# Altium PCB A_PCB.PcbDoc
Units mm, origin at the board's own origin, x right, y up, seen from the top; angles counter-clockwise.
Board outline 76.2 x 64.64 mm, 2 copper layers (Top Layer, Bottom Layer); 24 components, 14 nets, 58 pads, 0 vias.
Unrouted connection lines stored in the file: 3.
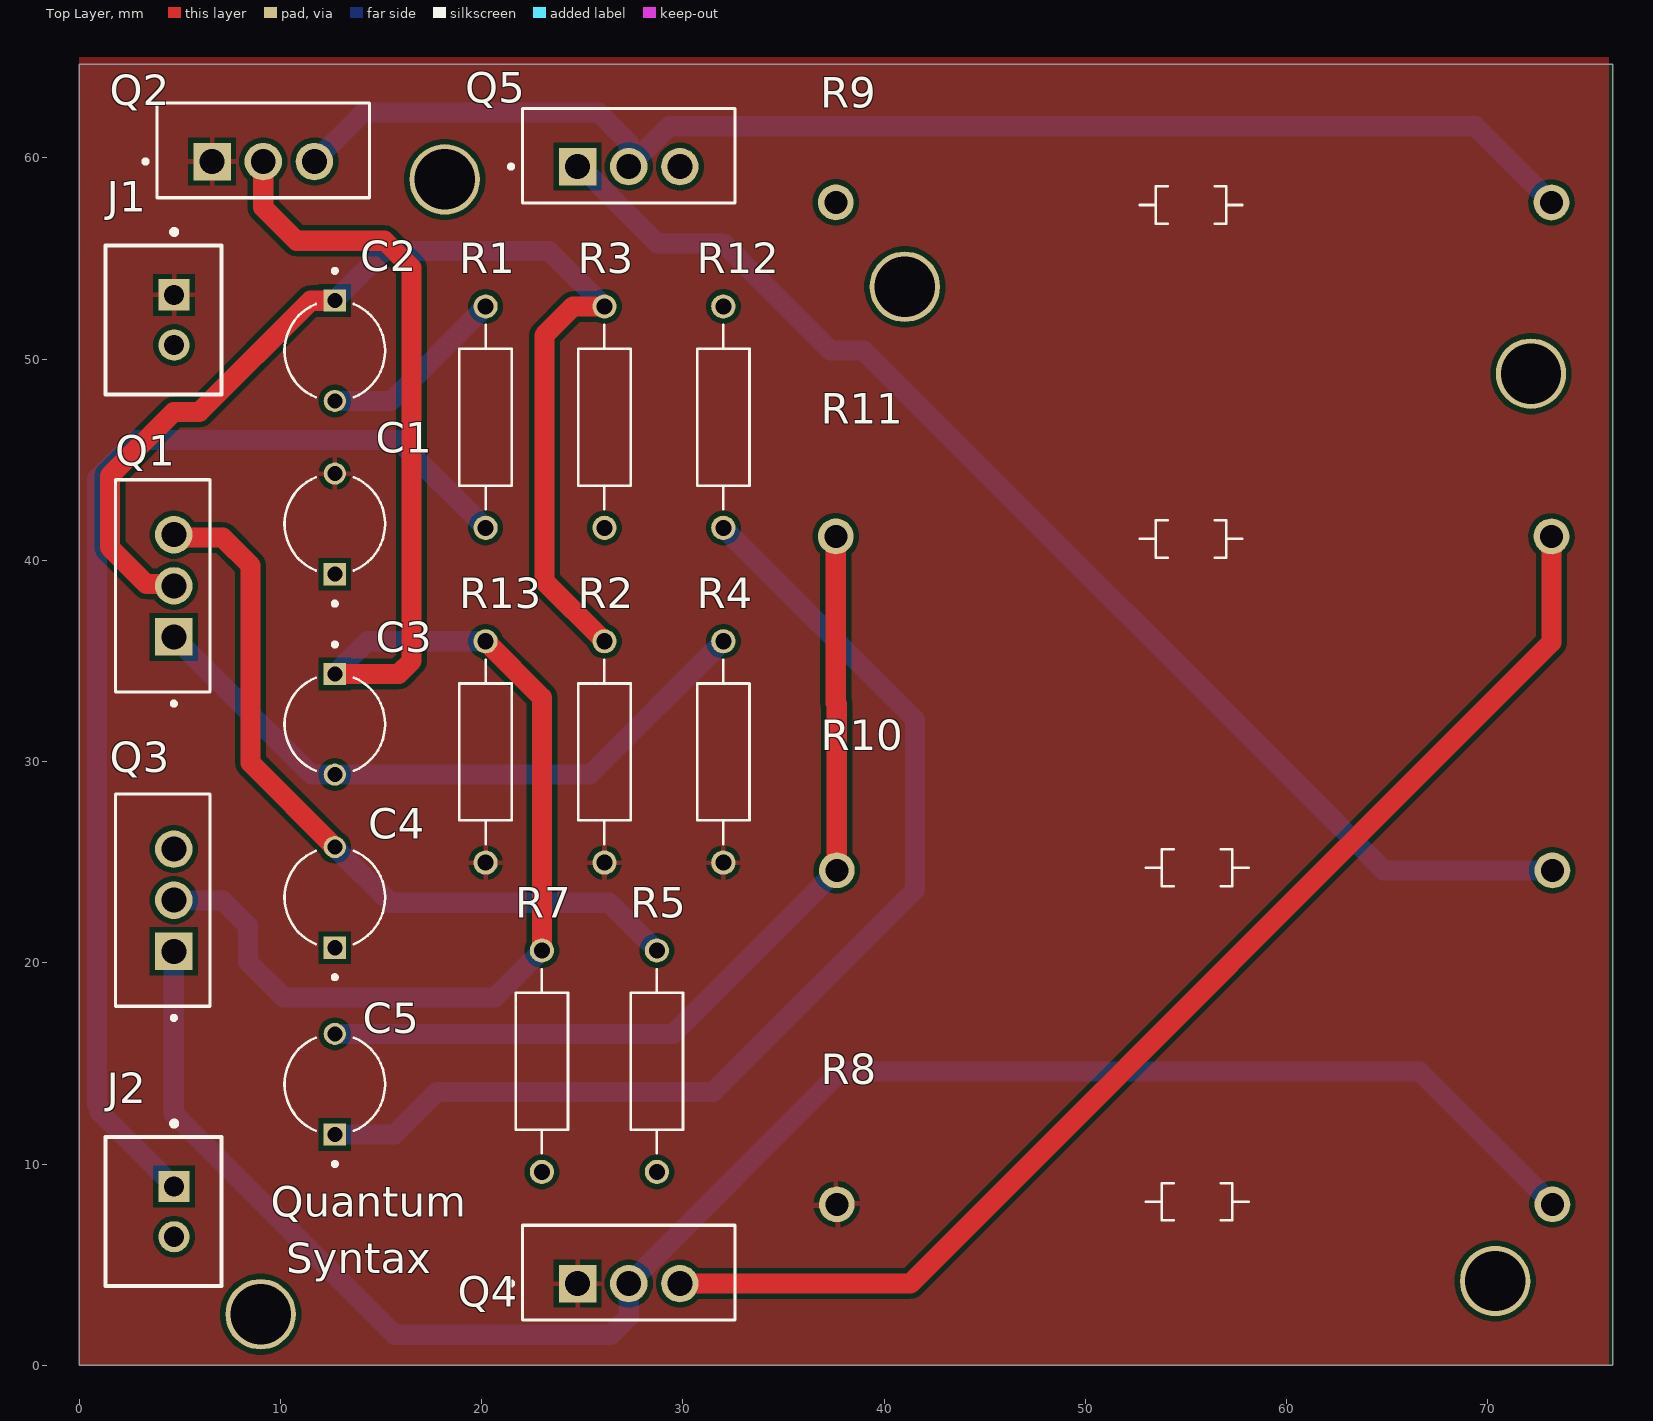
[diagram p0: Top Layer view]
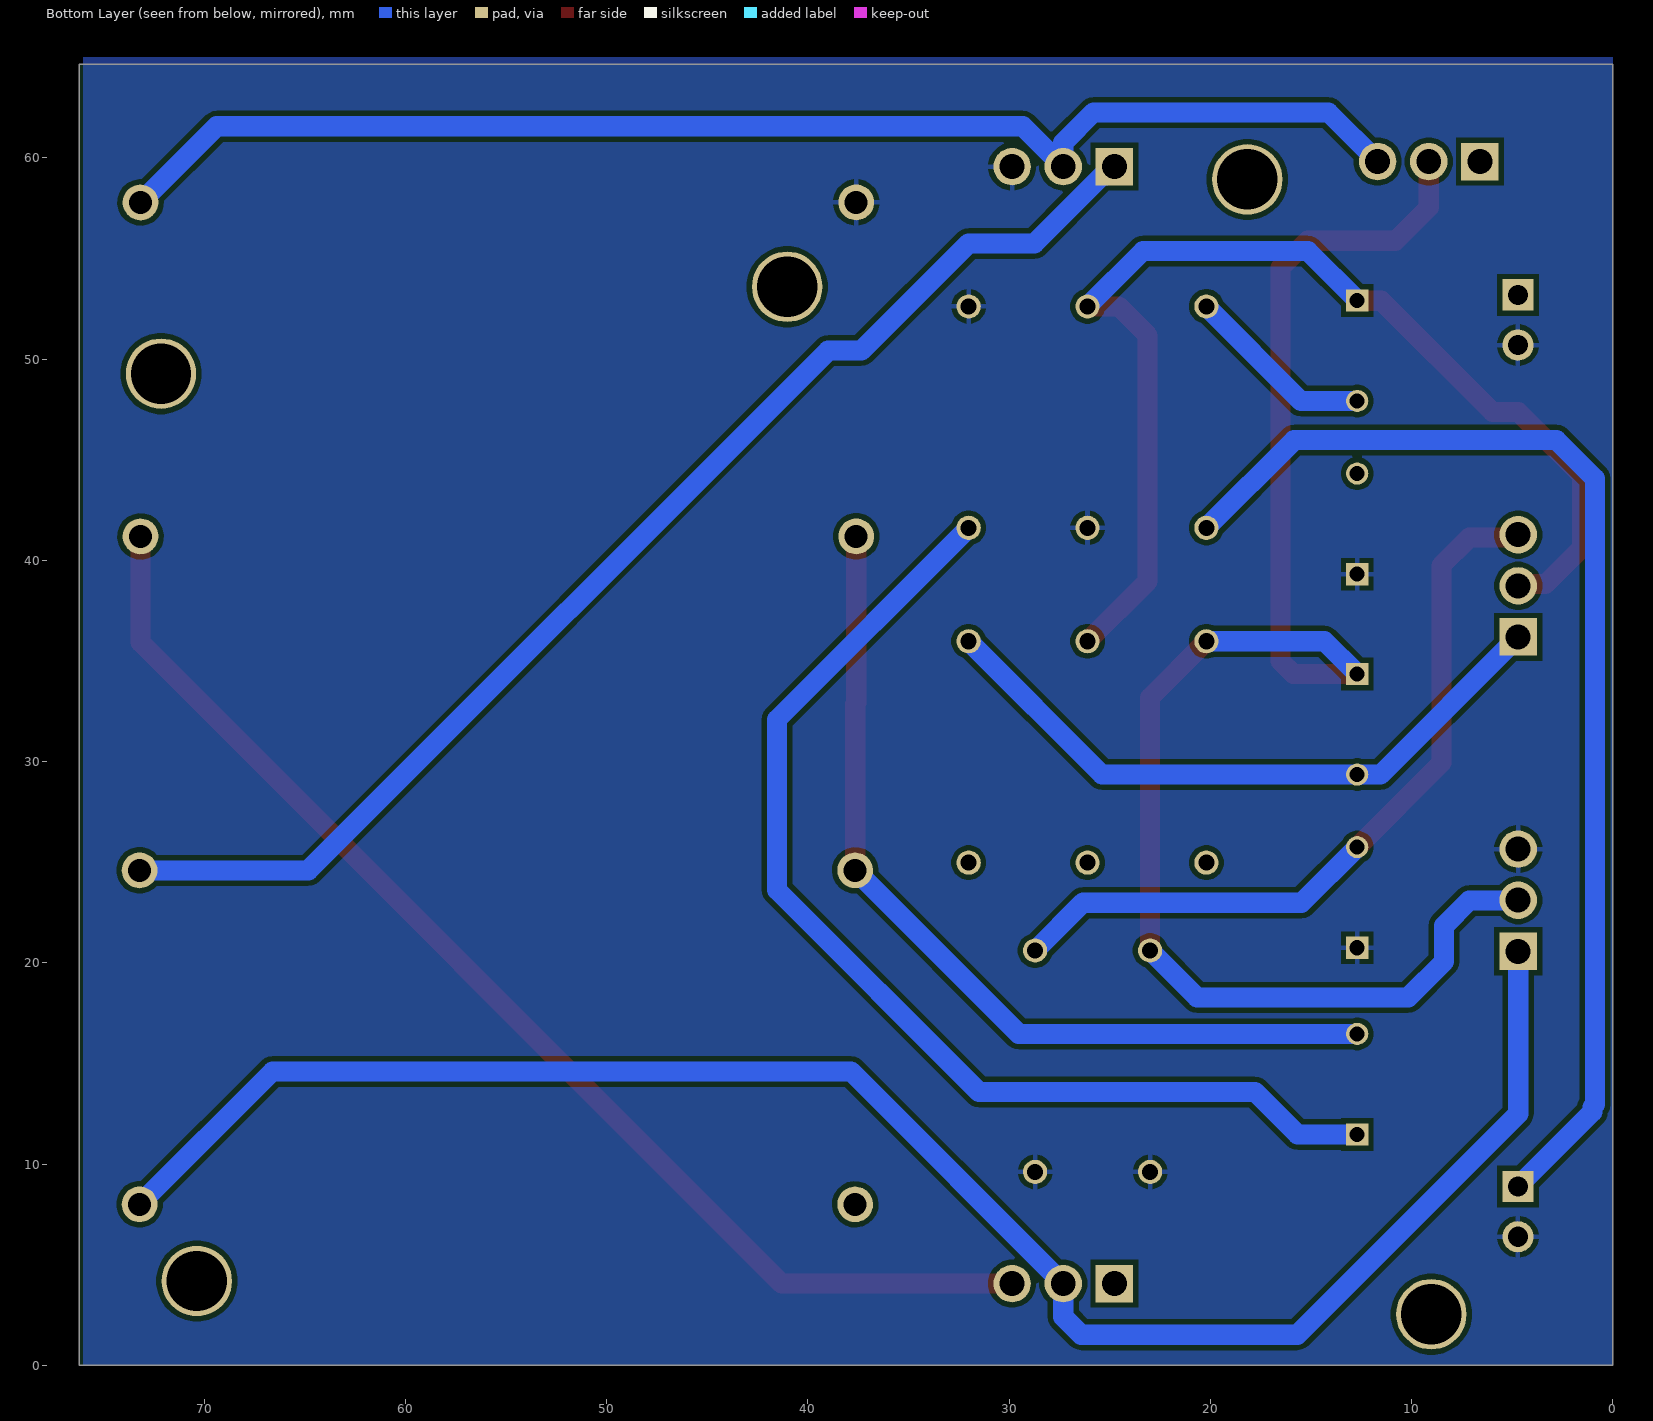
[diagram p1: Bottom Layer view, seen from below]
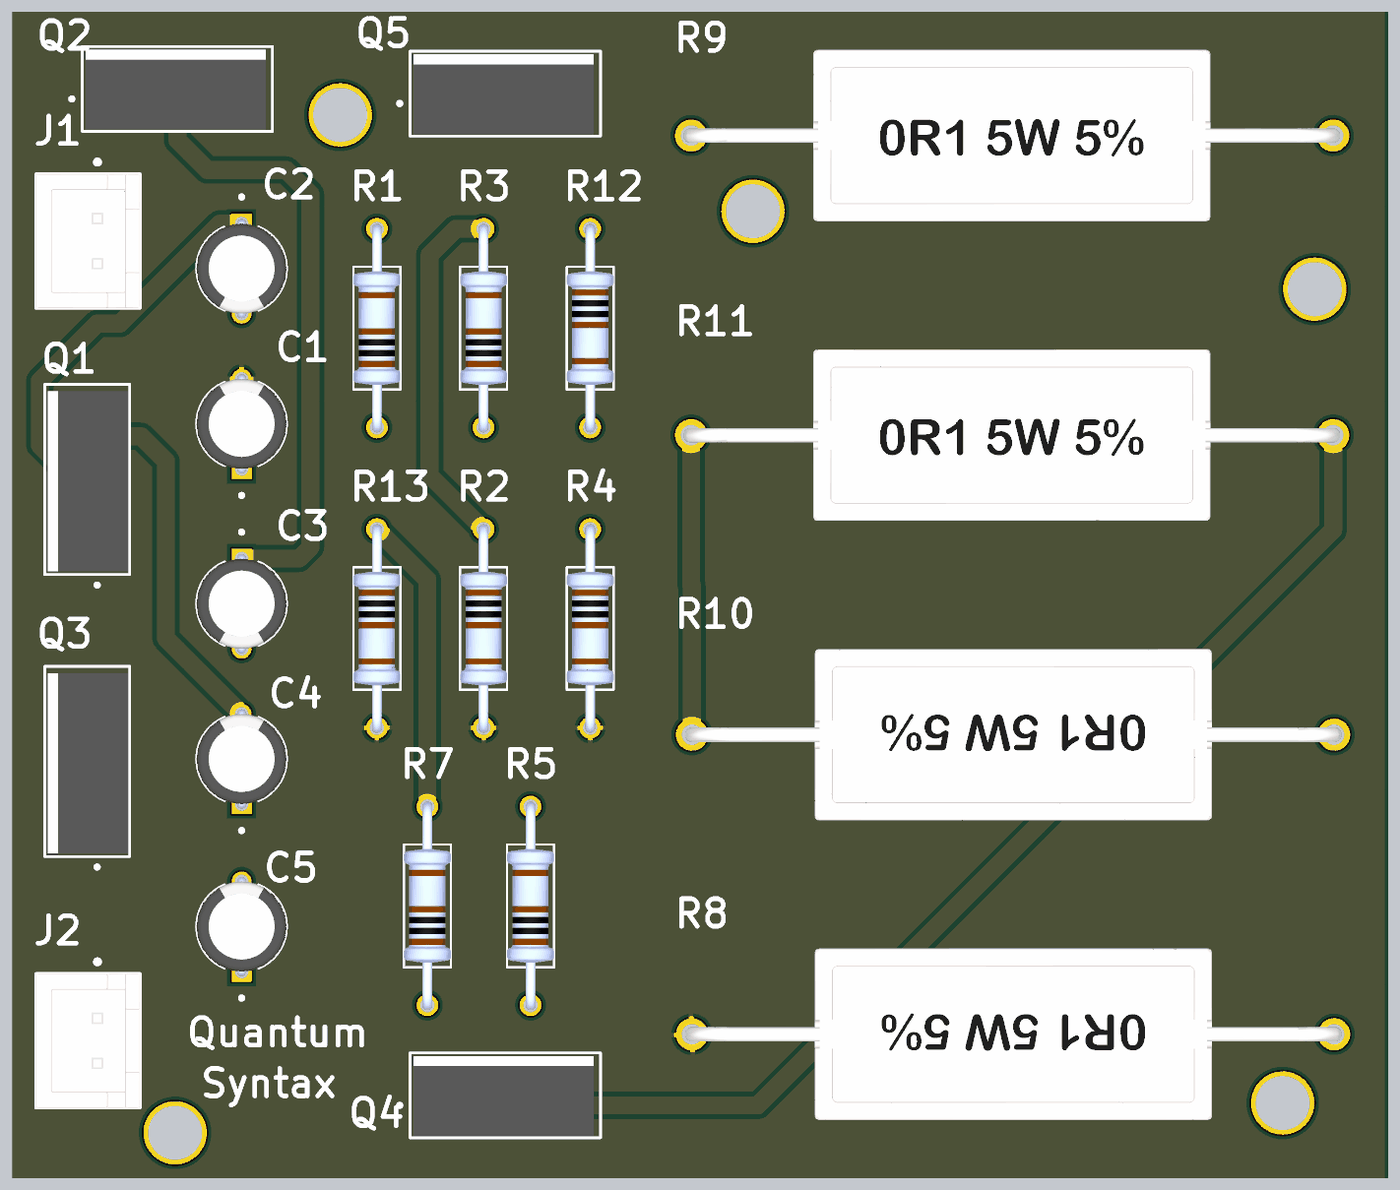
[diagram p2: 3D render of the assembled board from above, using the file's embedded part models]

## Layer stack, top to bottom
Top Solder: solder mask 0.0102, Solder Resist, Dk 3.5
Top Layer: signal copper 0.0356
Dielectric 1: dielectric 0.32, FR-4, Dk 4.8
Bottom Layer: signal copper 0.0356
Bottom Solder: solder mask 0.0102, Solder Resist, Dk 3.5

## Board outline
76.2,0 76.2,64.643 0,64.643 0,0

## Design rules (kind name [scope] priority, off if disabled: settings)
Clearance [All] p1: gap=0.254 ignorepadtopadclearanceinfootprint=FALSE except(0: Arc-Hole Track-Hole SMDPad-Hole THPad-Hole Via-Hole Fill-Hole Poly-Hole Region-Hole Text-Hole)
PolygonConnect [All] p1: connectstyle=Relief reliefconductorwidth=0.254 reliefentries=4 polygonreliefangle="90 Angle" airgapwidth=0.254
RoutingVias [All] p1: holewidth=0.711 width=1.27 viastyle="Through Hole" minholewidth=0.711 minwidth=1.27 maxholewidth=0.711 maxwidth=1.27
SolderMaskExpansion [All] p1: expansion=0.102 istentingtop=FALSE
Width [All] p1: maxlimit=1 minlimit=1 preferedwidth=1 minimp=50.000000 maximp=50.000000 favimp=50.000000
30 further rules are at their usual default settings.

## Classes and differential pairs
component class PCB_Schematic: C1 C2 C4 C5 J1 J2 Q1 Q2 Q3 Q5 R1 R2 R3 R4 R5 R7 R8 R9 R10 R11 R12 R13

## Components (designator, comment, footprint, x,y, rotation, side; value= is the part's Value field where it differs from the comment)
C1 "ECA1HM220E" CAPPRD500W50D500H1100 12.7,41.813 r90 top
C2 "ECA1HM220E" CAPPRD500W50D500H1100 12.7,50.419 r270 top
C3 "ECA1HM220E" CAPPRD500W50D500H1100 12.7,31.857 r270 top
C4 "ECA1HM220E" CAPPRD500W50D500H1100 12.7,23.251 r90 top
C5 "ECA1HM220E" CAPPRD500W50D500H1100 12.7,13.97 r90 top
J1 "B2B-XH-A(LF)(SN)" FP-B2B-XH-A_LF_SN-MFG 4.191,51.943 r270 top
J2 "B2B-XH-A(LF)(SN)" FP-B2B-XH-A_LF_SN-MFG 4.191,7.64 r270 top
Q1 "LM7805CT/NOPB" TO254P1054X470X2600-3 4.699,36.195 r90 top
Q2 "LM7805CT/NOPB" TO254P1054X470X2600-3 6.604,59.817 r0 top
Q3 "LM7805CT/NOPB" TO254P1054X470X2600-3 4.699,20.574 r90 top
Q4 "LM7805CT/NOPB" TO254P1054X470X2600-3 24.765,4.064 r0 top
Q5 "LM7805CT/NOPB" TO254P1054X470X2600-3 24.765,59.563 r0 top
R1 "MFR-25FBF52-1K" RESAD1100W55L680D260 20.193,47.117 r90 top
R2 "MFR-25FBF52-1K" RESAD1100W55L680D260 26.098,30.48 r270 top
R3 "MFR-25FBF52-1K" RESAD1100W55L680D260 26.098,47.117 r90 top
R4 "MFR-25FBF52-1K" RESAD1100W55L680D260 32.004,30.48 r270 top
R5 "MFR-25FBF52-1K" RESAD1100W55L680D260 28.702,15.113 r90 top
R7 "MFR-25FBF52-1K" RESAD1100W55L680D260 22.987,15.113 r90 top
R8 "1623928-4" RESAD700W45L350D185 55.549,8.128 r180 top
R9 "1623928-4" RESAD700W45L350D185 55.245,57.658 r0 top
R10 "1623928-4" RESAD700W45L350D185 55.549,24.723 r180 top
R11 "1623928-4" RESAD700W45L350D185 55.245,41.063 r0 top
R12 "MFR-25FBF52-1K" RESAD1100W55L680D260 32.004,47.117 r270 top
R13 "MFR-25FBF52-1K" RESAD1100W55L680D260 20.193,30.48 r270 top

## Footprints (in the part's own frame and the unit in brackets; to place one, negate y for a bottom-side part, rotate by r counter-clockwise, add the part's x,y. Pads: shape width x height; smd on the part's side, far side on the other; paste and mask are expansions set on the pad)
CAPPRD500W50D500H1100 [mm]
  round 1.1 hole 0.75: N(2.5,0)
  rect 1.1x1.1 hole 0.75: P(-2.5,0)
  silkscreen extent -4.06,-2.5 2.32,2.5, body extent -2.75,-2.5 2.75,2.5, height 11
FP-B2B-XH-A_LF_SN-MFG [mm]
  rect 1.55x1.55 hole 1 paste-1000 mask+0: 1(-1.25,0.525)
  round 1.55 hole 1 paste-1000 mask+0: 2(1.25,0.525)
  silkscreen extent -4.5,-2.88 3.7,2.87, body extent -3.8,-2.98 3.8,2.98, height 0.25
RESAD700W45L350D185 [mil]
  round 70 hole 45: 1(-695,5) 2(705,5)
  silkscreen extent -100,-36 100,36, body extent -711,-182 720,192, height 413
RESAD1100W55L680D260 [mm]
  round 1.2 hole 0.8: 1(-5.5,0) 2(5.5,0)
  silkscreen extent -4.58,-1.3 4.58,1.3, body extent -5.77,-1.3 5.77,1.3, height 2.6
TO254P1054X470X2600-3 [mm]
  rect 1.86x1.86 / inner round 1.86 / far side rect 1.86x1.86 hole 1.24: 1(0,0)
  round 1.86 hole 1.24: 2(2.54,0) 3(5.08,0)
  silkscreen extent -3.41,-1.8 7.81,2.9, body extent -2.54,-1.71 7.43,2.73, height 15.75

## Part data
C1 C2 C3 C4 C5: "Aluminum Electrolytic Capacitors - Radial Leaded", Package="RADIAL-2 Panasonic", Availability="In Stock", Check_prices=https://www.snapeda.com/parts/ECA-1HM220E/Panasonic/view-part/6222795/?ref=eda, MF=Panasonic, MP=ECA-1HM220E, Price=None, SnapEDA_Link=https://www.snapeda.com/parts/ECA-1HM220E/Panasonic/view-part/6222795/?ref=snap
J1 J2: library part CMP-2000-05888-3, "CONN HEADER VERT 2POS 2.5MM", Color=Natural, Contact Resistance=20mR, Current Rating=3A, Housing Color=White, Insulation Resistance=1GR, Max Operating Temperature=85°C, Max Voltage Rating (AC)=250V, Min Operating Temperature=-25°C, Connector Type="Male Pin", Contact Material=Brass, Contact Plating=Tin, Contact Type="Male Pin", Depth=5.75mm, Fastening Type=Detent, Housing Material=Polyamide, Lead Free="Lead Free", Lead Pitch=2.5mm, Length=7.4mm, Max Current Rating=3A, Max Voltage Rating (DC)=250V, Mount="Through Hole", Number of Contacts=2, Number of Positions=2, Number of Rows=1, Orientation=Straight, Packaging=Bulk, Pitch=2.5mm, REACH SVHC="No SVHC", Series=XH, Termination=Solder, Voltage Rating=250V, Voltage Rating (AC)=250V, Wire/Cable Gauge=22AWG
Q1 Q2 Q3 Q4 Q5: "IC Regulator 7805T/LM7805T COMSET RoHS TO220", Package="TO-220 Comset Semiconductors", Availability="Not in stock", Check_prices=https://www.snapeda.com/parts/LM7805CT/Comset+Semiconductors/view-part/?ref=eda, MF="Comset Semiconductors", MP=LM7805CT, Price=None, SnapEDA_Link=https://www.snapeda.com/parts/LM7805CT/Comset+Semiconductors/view-part/?ref=snap
R1 R2 R3 R4 R5 R7 R12 R13: "1.07 kOhms Â±1% 0.25W, 1/4W Through Hole Resistor Axial - Metal Film", Package="Axial Yageo", Availability="In Stock", Check_prices=https://www.snapeda.com/parts/MFR-25FBF52-1K/Yageo/view-part/?ref=eda, MF=Yageo, MP=MFR-25FBF52-1K, Price=None, Purchase-URL=https://pricing.snapeda.com/search/part/MFR-25FBF52-1K/?ref=eda, SnapEDA_Link=https://www.snapeda.com/parts/MFR-25FBF52-1K/Yageo/view-part/?ref=snap
R8 R9 R10 R11: "CFR16 5% 10K", Package=None, Availability=Unavailable, MP=1623928-4, Price=None

## Free pads (board coordinates)
  round 3.5 hole 3: 21(9.017,2.54) 21(18.161,58.928) 21(41.021,53.594) 21(70.358,4.191) 21(72.136,49.276)

## Nets (pads, with @x,y where several pads share a name; then routed paths per layer and width w, separated by ;. In a path a pad name is that pad's centre, name@x,y a point inside that pad or via, vN(x,y) a via of type N, cw(c..) or ccw(c..) an arc to the next point about the centre after c; other vN are vias at no path point)
GND: C1.P C4.P J1.2 J2.2 Q3.3 Q5.3 R3.1 R5.1 R7.1 R9.1 R12.1
NetC2_N: C2.N R1.2 | length 9.4
  Bottom Layer w1: C2.N 15.495,47.919 R1.2
NetC2_P: C2.P Q1.2 R2.1 R3.2 | length 57.9
  Top Layer w1: Q1.2 4.616,38.818 3.346,38.818 1.524,40.64 1.524,44.196 4.699,47.371 5.969,47.371 11.498,52.9 12.681,52.9 C2.P ; R2.1 23.114,38.965 23.114,51.181 24.55,52.617 R3.2
  Bottom Layer w1: C2.P 15.153,55.372 23.344,55.372 R3.2
NetC3_N: C3.N Q1.1 R4.1 | length 32.9
  Bottom Layer w1: Q1.1 11.537,29.357 C3.N 25.381,29.357 R4.1
NetC3_P: C3.P Q2.2 Q3.2 R7.2 R13.1 | length 81.5
  Top Layer w1: Q2.2 9.144,57.531 10.795,55.88 15.172,55.88 16.512,54.54 16.512,34.994 15.875,34.357 C3.P ; R13.1 22.987,33.186 R7.2
  Bottom Layer w1: Q3.2 4.716,23.097 7.129,23.097 8.382,21.844 8.382,20.066 10.16,18.288 20.662,18.288 R7.2 ; C3.P 14.323,35.98 R13.1
NetC4_N: C4.N Q1.3 R5.2 | length 38.3
  Top Layer w1: Q1.3 4.843,41.131 7.129,41.131 8.509,39.751 8.509,29.942 C4.N
  Bottom Layer w1: C4.N 15.464,22.987 26.328,22.987 R5.2
NetC5_N: C5.N R10.2 R11.1 | length 44.9
  Top Layer w1: R11.1 37.592,32.918 37.642,32.868 R10.2
  Bottom Layer w1: C5.N 29.517,16.47 R10.2
NetC5_P: C5.P R12.2 | length 55.8
  Bottom Layer w1: C5.P 15.661,11.47 17.78,13.589 31.496,13.589 41.529,23.622 41.529,32.092 R12.2
NetJ2_1: J2.1 R1.1 | length 58.7
  Bottom Layer w1: J2.1 1.016,12.59 1.016,12.827 0.889,12.954 0.889,44.069 2.794,45.974 15.836,45.974 R1.1
NetQ2_3: pad.21@18.161,58.928 Q2.3 Q5.2 R9.2 | length 66.7
  Bottom Layer w1: Q2.3 14.122,62.255 25.806,62.255 27.305,60.757 Q5.2 29.312,61.57 69.367,61.57 R9.2
NetQ3_1: pad.21@9.017,2.54 Q3.1 Q4.2 R8.1 | length 90.2
  Bottom Layer w1: Q3.1 4.699,12.497 15.672,1.524 26.416,1.524 27.305,2.413 Q4.2 37.846,14.605 66.598,14.605 R8.1
NetQ4_3: Q4.3 R11.2 | length 61.8
  Top Layer w1: Q4.3 41.3,4.064 73.152,35.916 R11.2
NetQ5_1: pad.21@41.021,53.594 Q5.1 R10.1 | length 62.9
  Bottom Layer w1: Q5.1 25.195,59.133 25.353,59.133 28.733,55.753 32.004,55.753 37.338,50.419 38.989,50.419 64.812,24.596 R10.1
Vcc: C1.N J1.1 Q2.1 Q4.1 R2.2 R4.2 R8.2 R13.2

## Polygon pours and split planes (outlines as drawn)
GND on Bottom Layer "GND_L02_P004" (solid, pour order 4): 0,0 76,0 76,65 0,65
Vcc on Top Layer "VCC_L01_P005" (solid, pour order 5): 0,0 76,0 76,65 0,65

## Silkscreen, mask and mechanical layers (free items; w line width, h text height)
Top Overlay:
  text "Quantum" at 9.525,7.384 h1.52
  text "Syntax" at 10.287,4.572 h1.52